# Altium PCB Star.PcbDoc
Units mm, origin at the board's own origin, x right, y up, seen from the top; angles counter-clockwise.
Board outline 199.68 x 189.91 mm, 4 copper layers (Top Copper, Signal Layer 1, Signal Layer 2, Bottom Copper), stack 1.57 mm thick; 86 components, 80 nets, 336 pads, 5 vias.
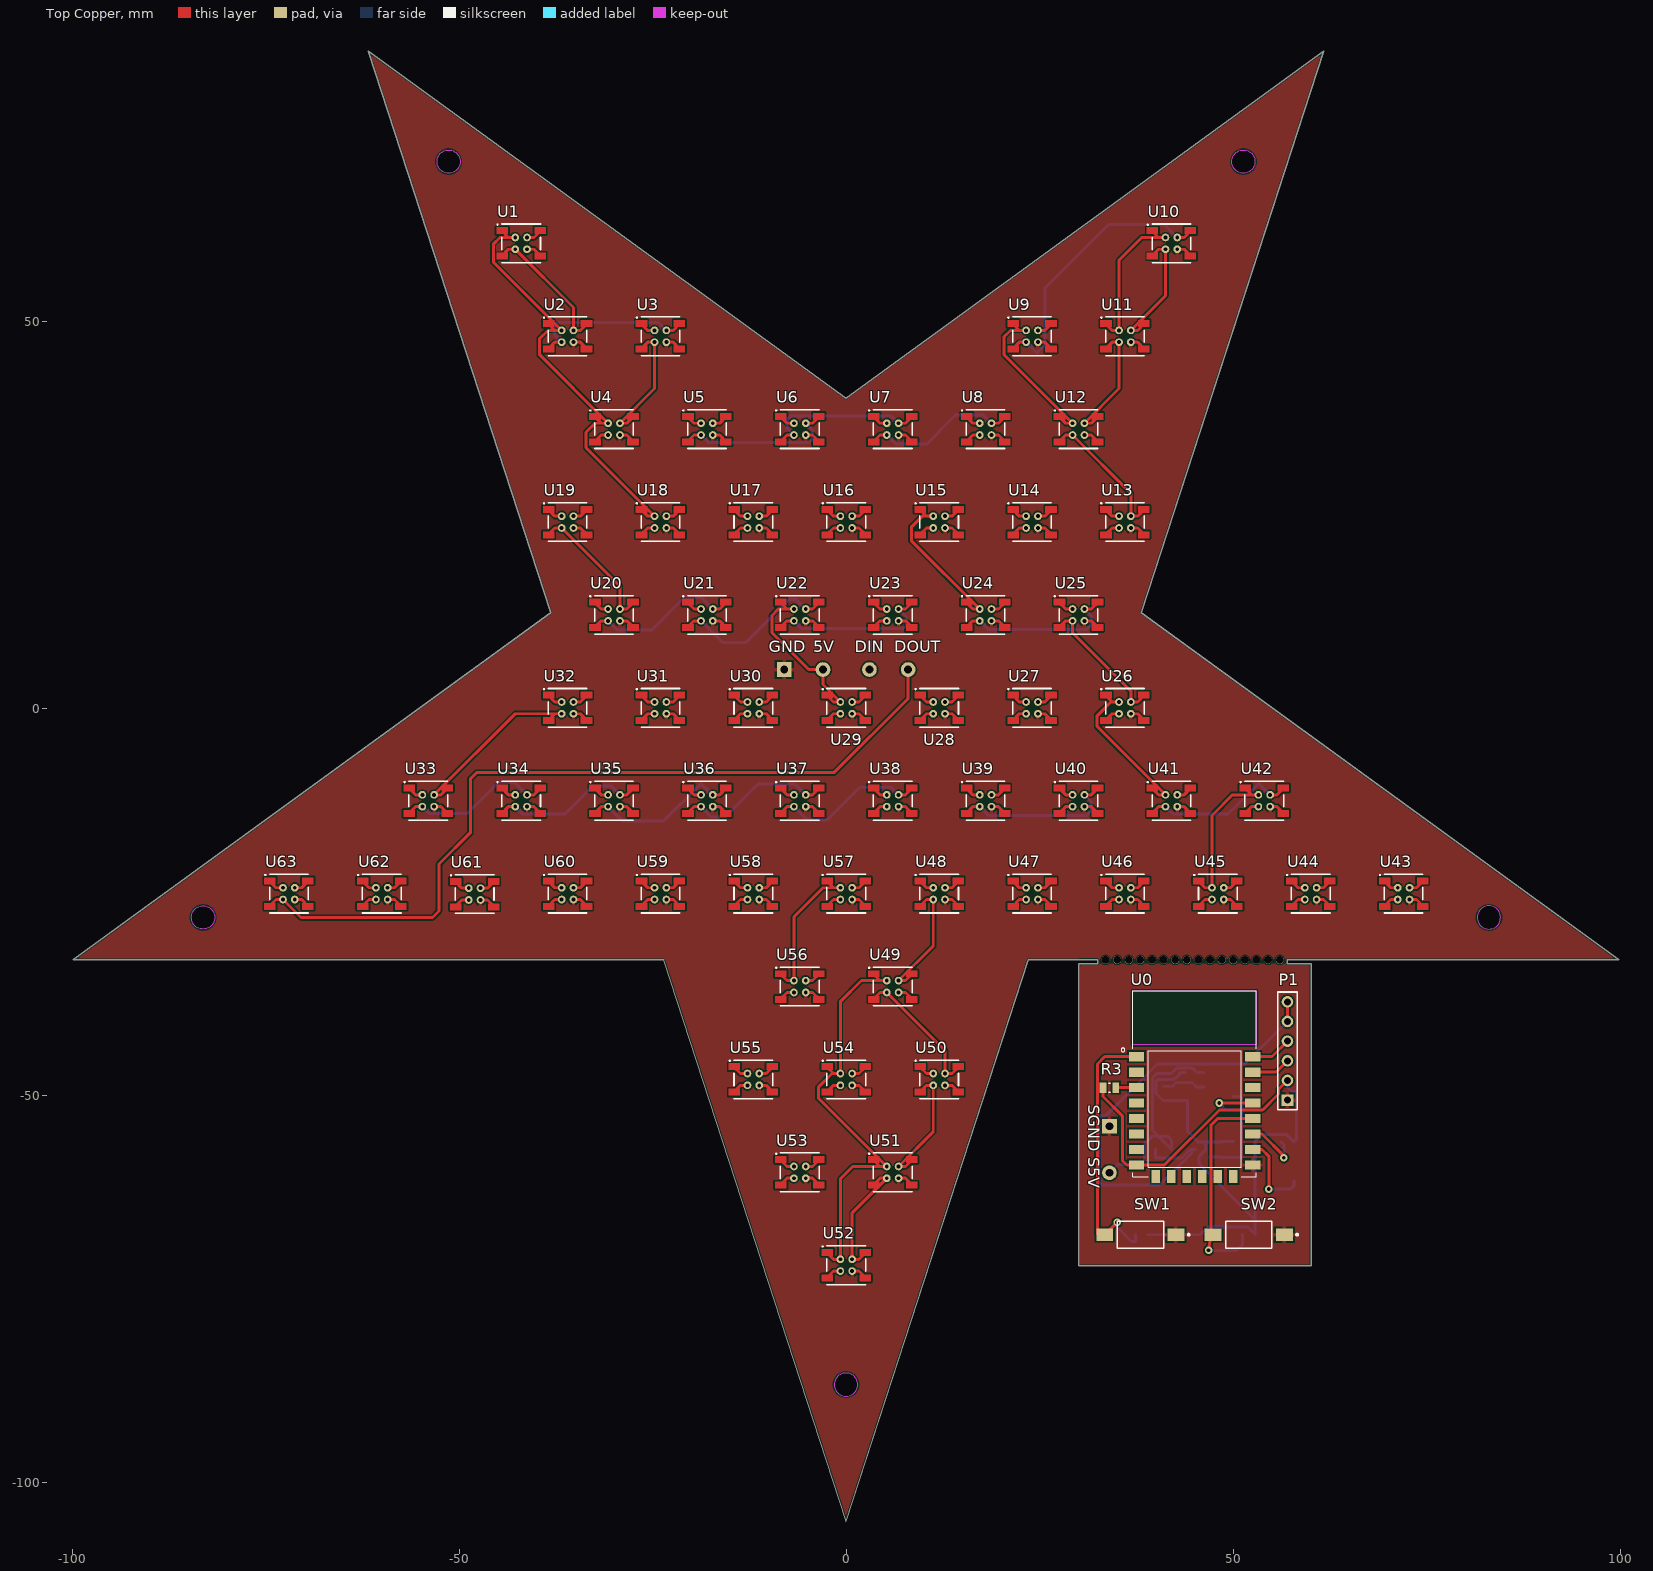
[diagram p0: Top Copper view]
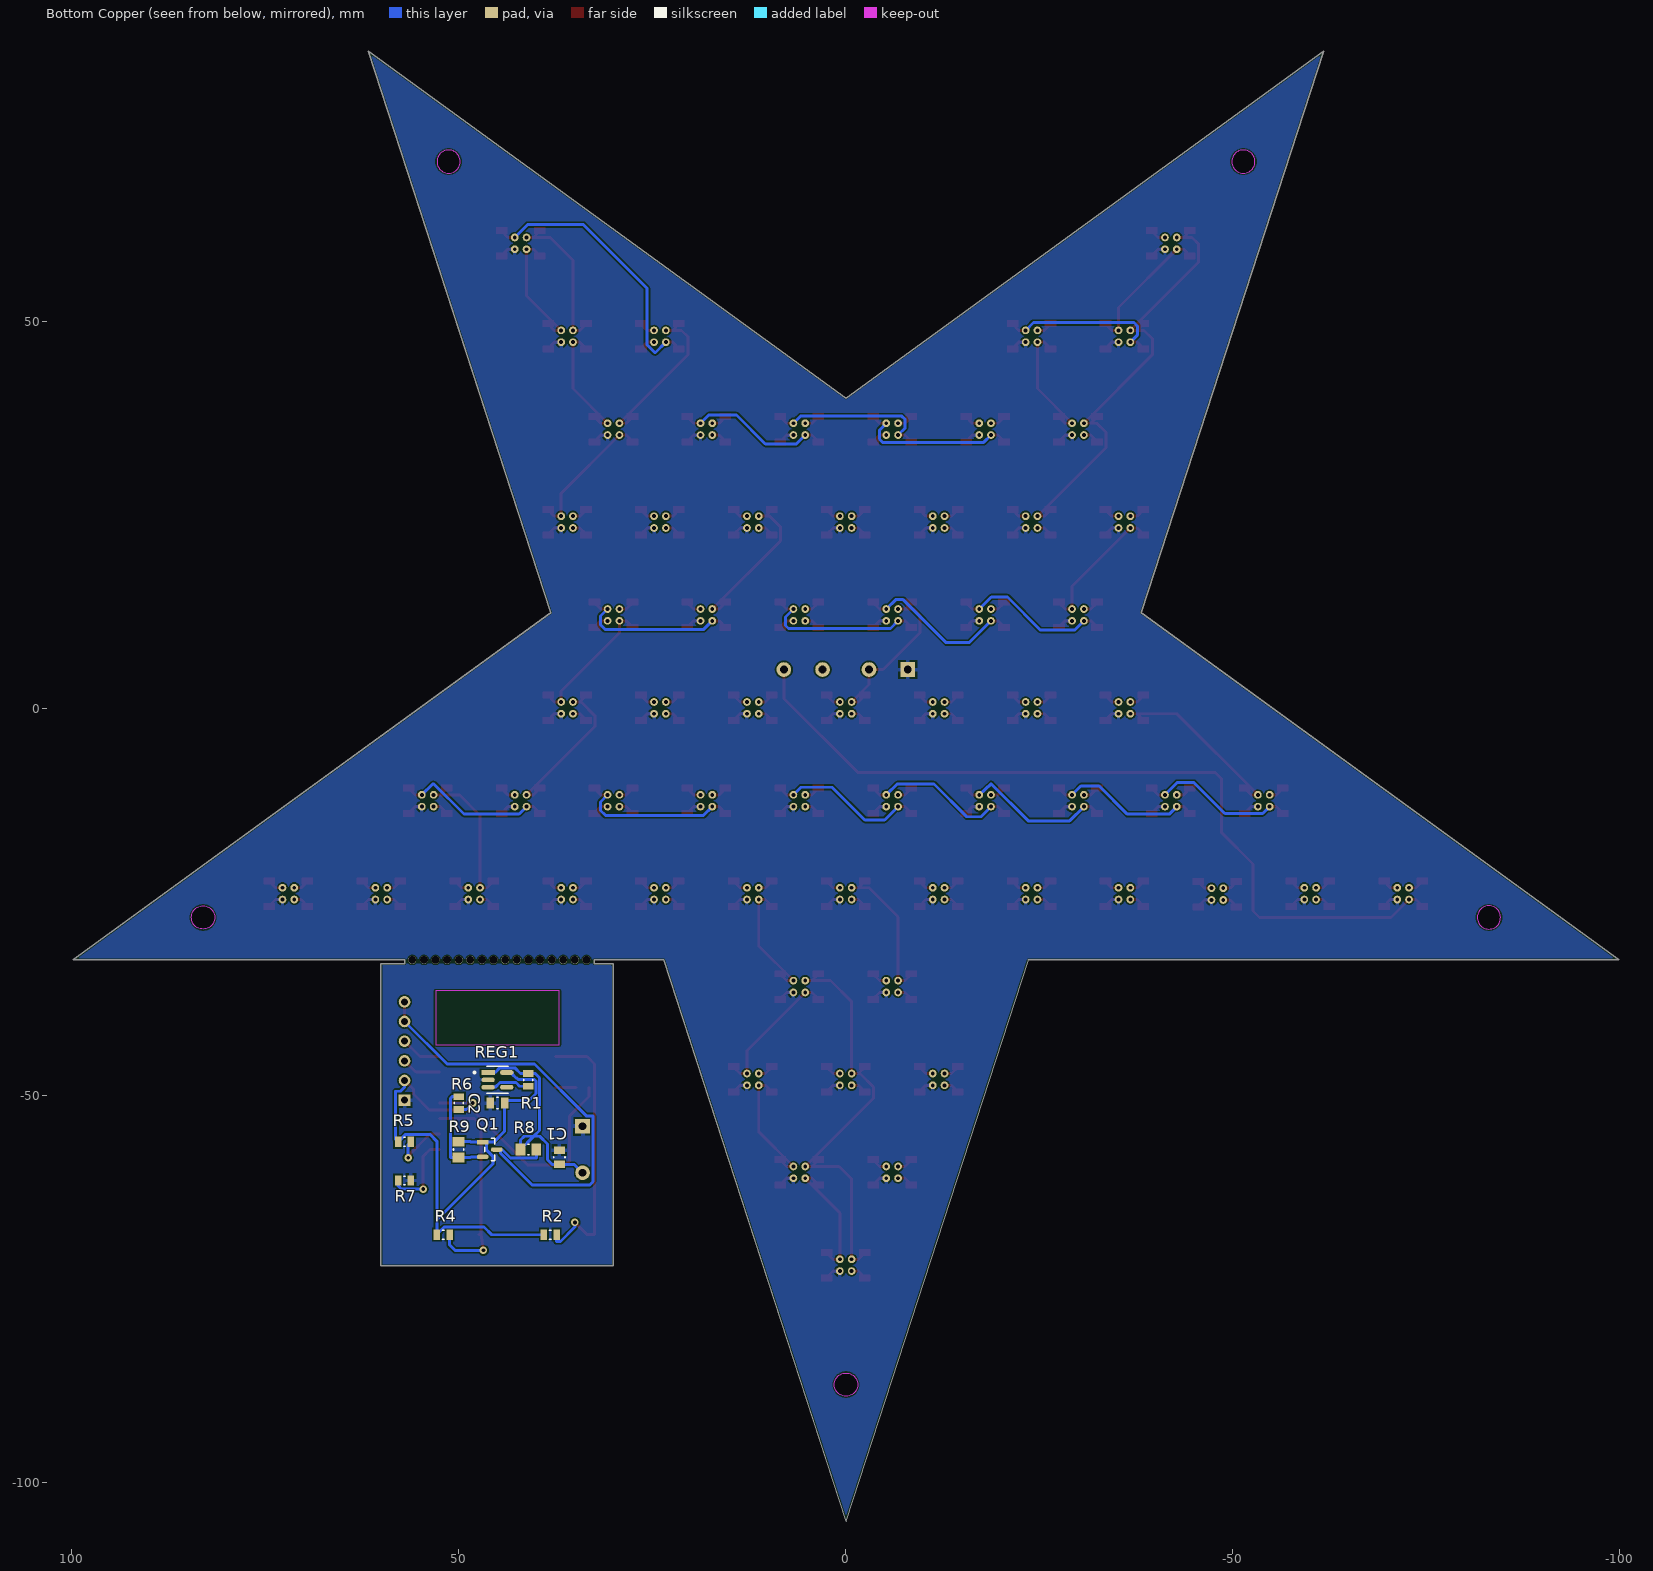
[diagram p1: Bottom Copper view, seen from below]
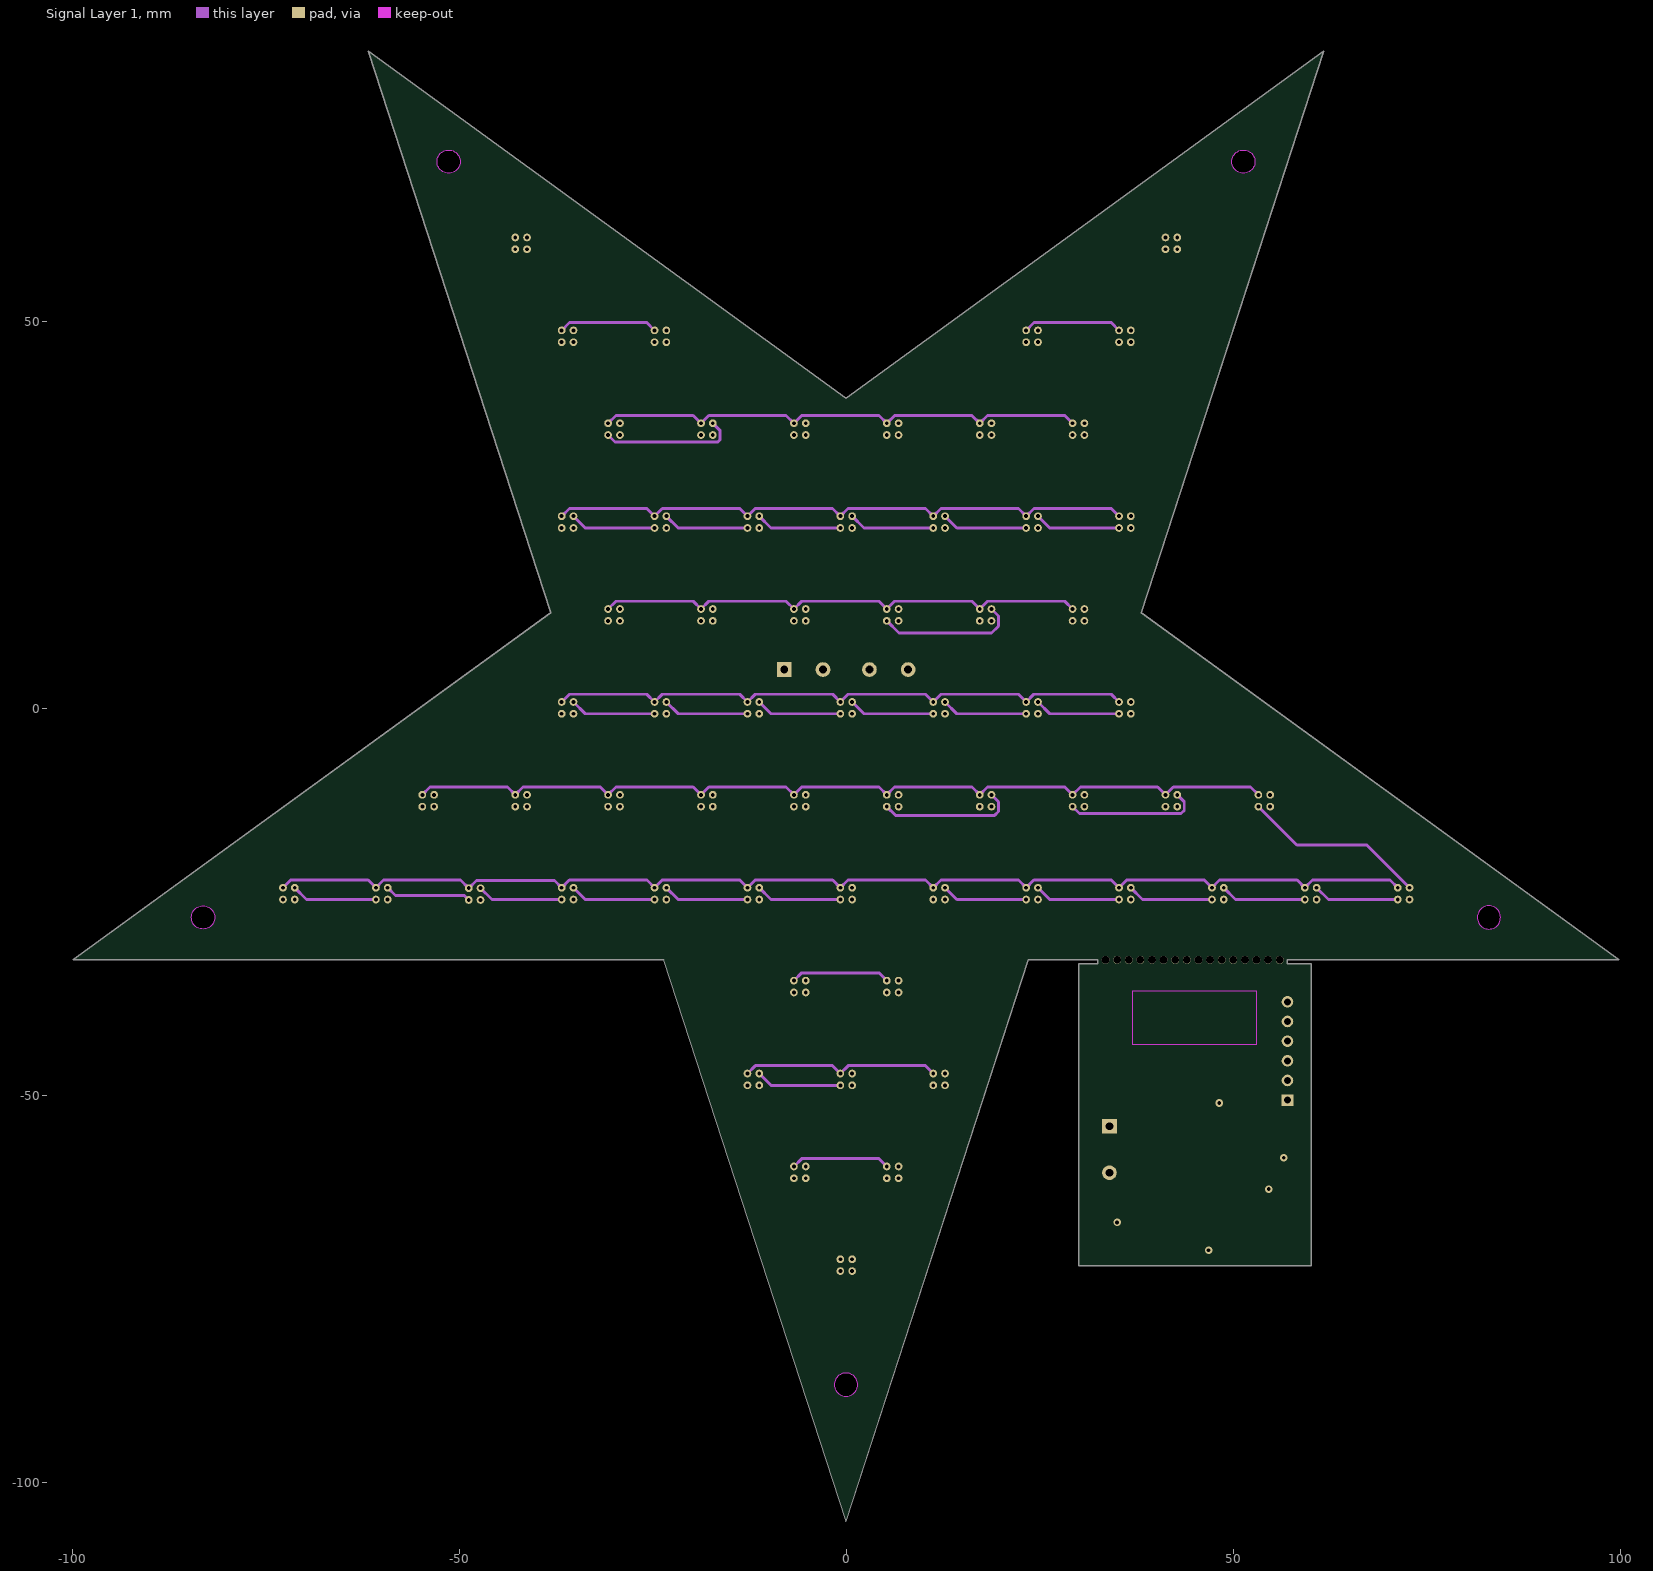
[diagram p2: Signal Layer 1]
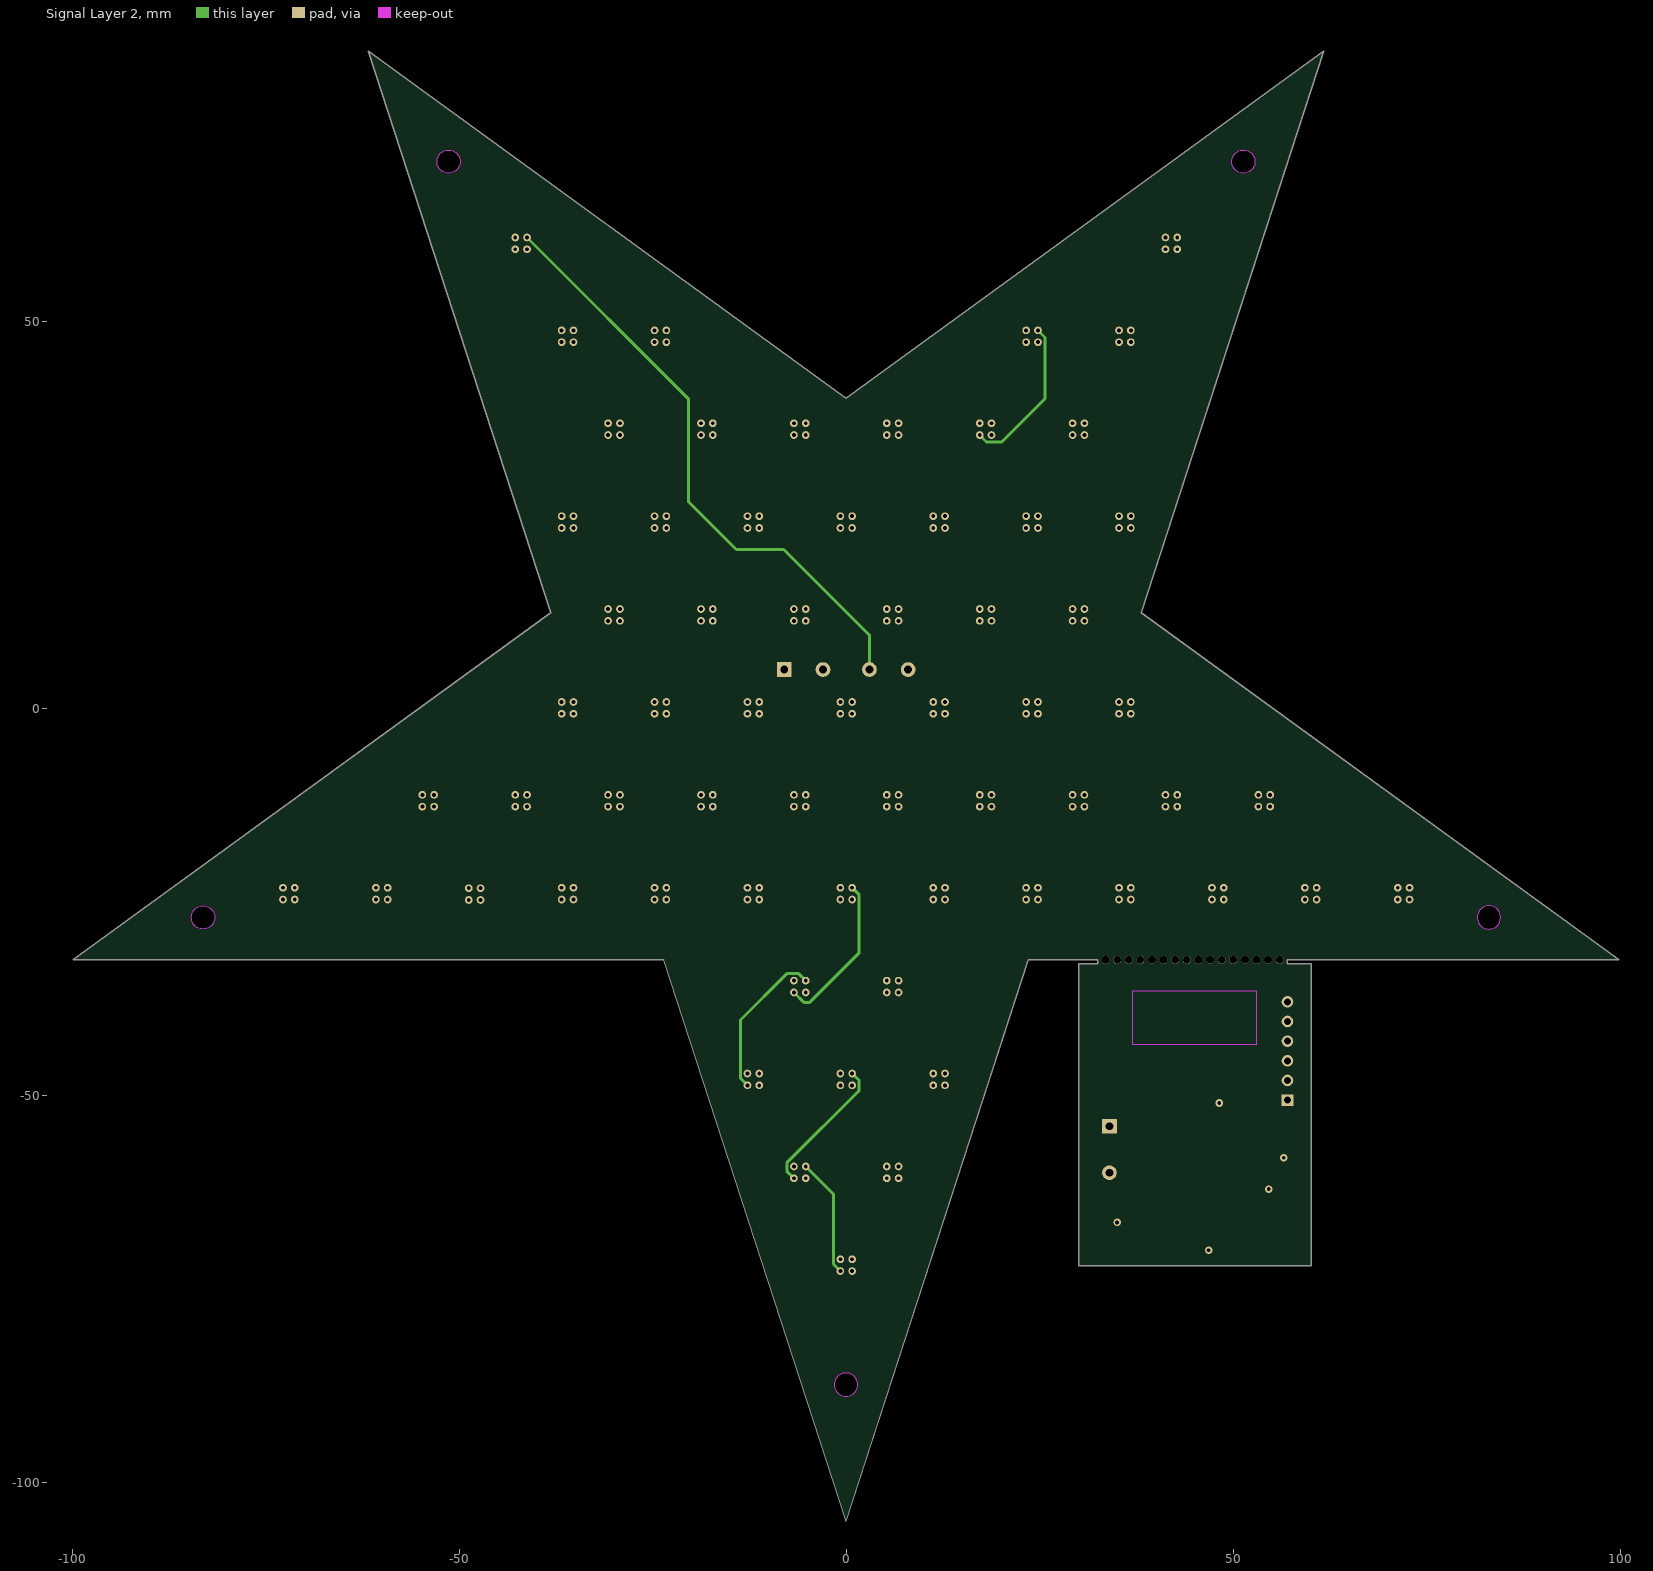
[diagram p3: Signal Layer 2]
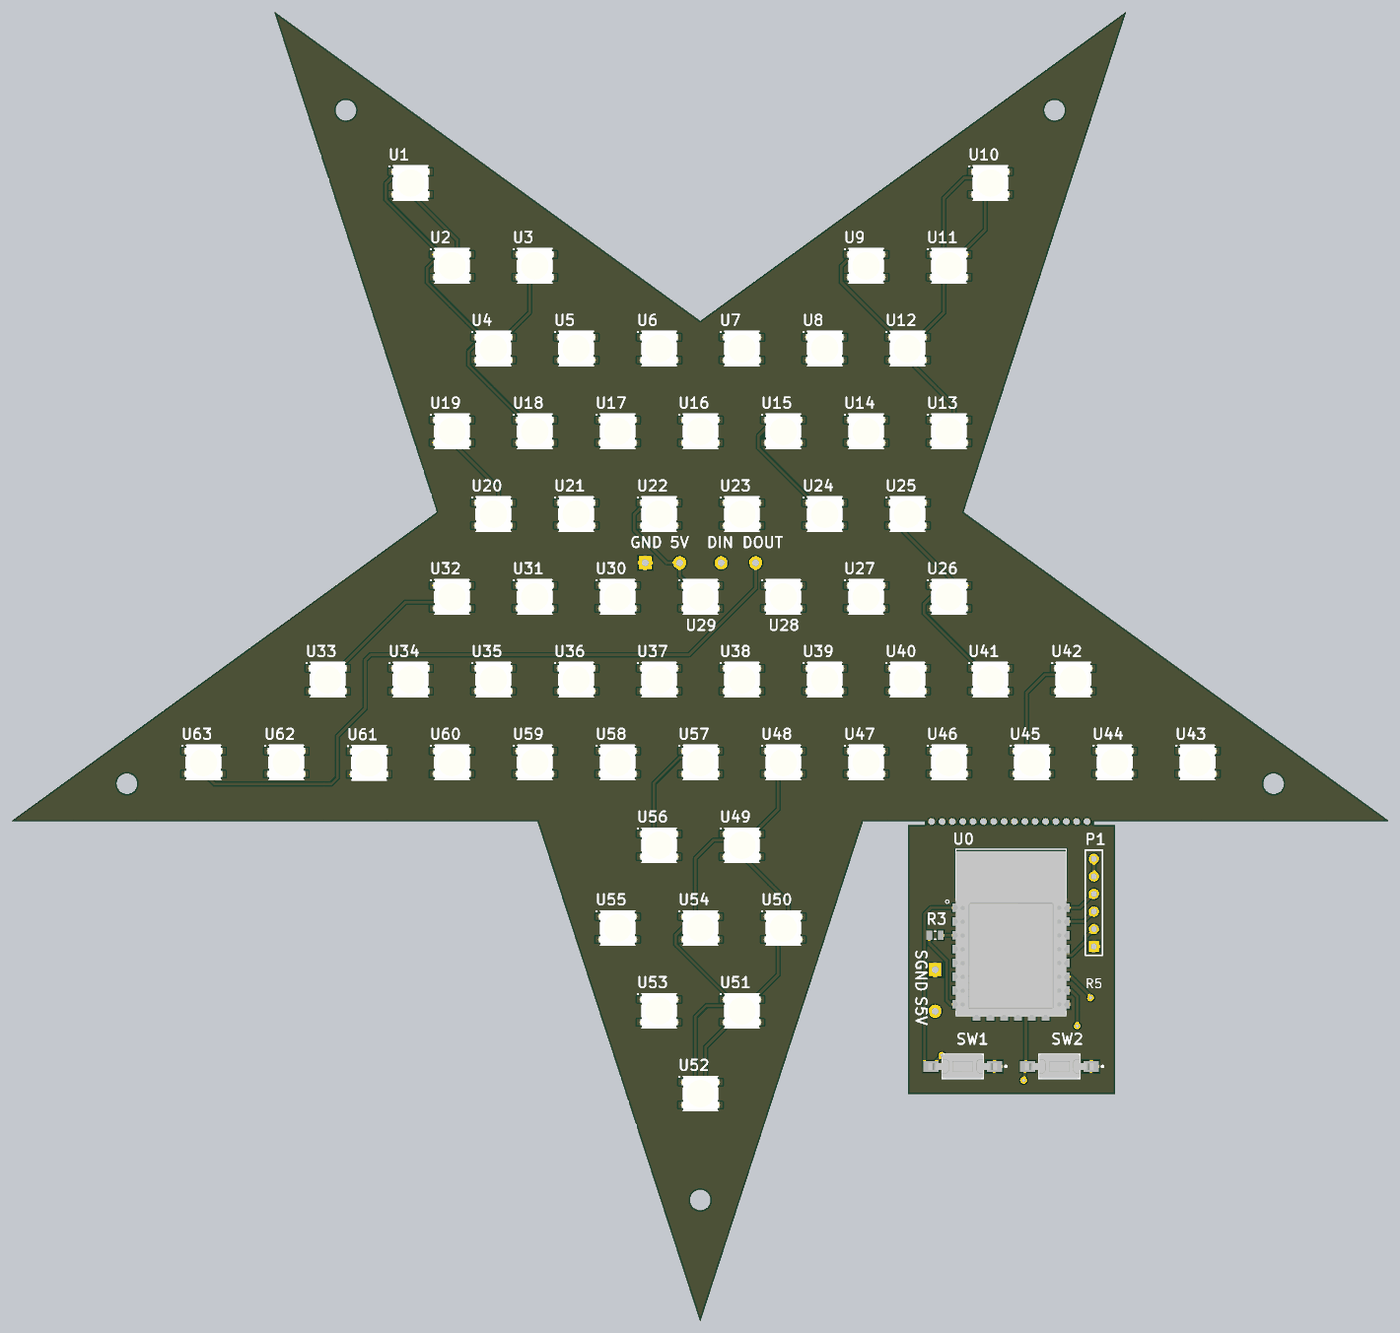
[diagram p4: 3D render of the assembled board from above, using the file's embedded part models]

## Layer stack, top to bottom
Top Mask: solder mask 0.015, Solder Resist, Dk 3.8
Top Copper: signal copper 0.035
Dielectric 1: prepreg 0.1, 2313, Dk 4.05
Signal Layer 1: signal copper 0.0175
Core: core 1.265, FR-4, Dk 4.5
Signal Layer 2: signal copper 0.0175
Dielectric 2: prepreg 0.1, 2313, Dk 4.05
Bottom Copper: signal copper 0.035
Bottom Mask: solder mask 0.015, Solder Resist, Dk 3.8

## Board outline
60.042,-33 57,-33 57,-32.485 60.042,-32.485 99.813,-32.478 38.113,12.35 61.678,84.891 -0.023,40.063 -61.732,84.891 -38.164,12.358 -99.867,-32.478 -23.601,-32.478 -0.027,-105.016 23.541,-32.483 30.049,-32.478 32.5,-32.478 32.5,-33 30.049,-33 30.057,-72 60.042,-72
cut-out: -51.359,69.114 cw(c-51.359,70.614) -52.859,70.614 cw(c-51.359,70.614) -51.359,72.114 cw(c-51.359,70.614) -49.859,70.614 cw(c-51.359,70.614)
cut-out: -83.084,-28.525 cw(c-83.084,-27.025) -84.584,-27.025 cw(c-83.084,-27.025) -83.084,-25.525 cw(c-83.084,-27.025) -81.584,-27.025 cw(c-83.084,-27.025)
cut-out: -1.527,-87.369 ccw(c-0.027,-87.369) -0.027,-88.869 ccw(c-0.027,-87.369) 1.473,-87.369 ccw(c-0.027,-87.369) -0.027,-85.869 ccw(c-0.027,-87.369)
cut-out: 81.53,-27.025 ccw(c83.03,-27.025) 83.03,-28.525 ccw(c83.03,-27.025) 84.53,-27.025 ccw(c83.03,-27.025) 83.03,-25.525 ccw(c83.03,-27.025)
cut-out: 51.305,69.114 cw(c51.305,70.614) 49.805,70.614 cw(c51.305,70.614) 51.305,72.114 cw(c51.305,70.614) 52.805,70.614 cw(c51.305,70.614)

## Design rules (kind name [scope] priority, off if disabled: settings)
BoardOutlineClearance [All] p1: gap=0.2 ignorepadtopadclearanceinfootprint=FALSE except(0.4: Arc-SplitBarrior Arc-SplitContinuation Track-SplitBarrior Track-SplitContinuation SMDPad-SplitBarrior SMDPad-SplitContinuation THPad-SplitBarrior THPad-SplitContinuation Via-SplitBarrior Via-SplitContinuation Fill-SplitBarrior Fill-SplitContinuation Poly-SplitBarrior Poly-SplitContinuation Region-SplitBarrior Region-SplitContinuation Text-SplitBarrior Text-SplitContinuation)
Clearance "Clearance Bottom Layer" [OnLayer('Bottom Layer')] p1: gap=0.203 ignorepadtopadclearanceinfootprint=TRUE except(0.254: Arc-Text Track-Text SMDPad-Text THPad-Text Via-Text Fill-Text Poly-Text Region-Text Text-Text)
Clearance "Clearance Top Layer" [OnLayer('Top Layer')] p2: gap=0.203 ignorepadtopadclearanceinfootprint=TRUE except(0.254: Arc-Text Track-Text SMDPad-Text THPad-Text Via-Text Fill-Text Poly-Text Region-Text Text-Text)
Clearance [All] p3: gap=0.2 ignorepadtopadclearanceinfootprint=FALSE except(0.089: Arc-Arc Arc-Track Arc-SMDPad Track-Track Track-SMDPad SMDPad-SMDPad; 0.127: Arc-Via Track-Via SMDPad-Via THPad-Via Via-Via; 0.254: Arc-Text Track-Text SMDPad-Text THPad-Text Via-Text Fill-Text Poly-Text Region-Text Text-Text)
HoleSize [All] p1: absolutevalues=TRUE maxlimit=6.3 minlimit=0.2 maxpercent=80.000 minpercent=20.000
MinimumAnnularRing [All] p1: minimumring=0.076
MinimumSolderMaskSliver [All] p1: minsoldermaskwidth=0.1
PolygonConnect PolygonConnect_1 [All] p1: thpad.connectstyle=Relief thpad.reliefconductorwidth=0.508 thpad.reliefentries=4 thpad.polygonreliefangle="90 Angle" thpad.airgapwidth=0.254 smdpad.connectstyle=Relief smdpad.reliefconductorwidth=0.508 smdpad.reliefentries=4 smdpad.polygonreliefangle="90 Angle" smdpad.airgapwidth=0.254 via.connectstyle=Direct via.reliefconductorwidth=0.508 via.reliefentries=4 via.polygonreliefangle="90 Angle" via.airgapwidth=0.254
RoutingCorners [All] p1: cornerstyle=Round minsetback=2.54 maxsetback=2.54
RoutingVias [All] p1: holewidth=0.5 width=1 viastyle="Through Hole" minholewidth=0.2 minwidth=0.45 maxholewidth=1 maxwidth=2
SilkToSilkClearance [All] p1: silktosilkclearance=0.1
SilkToSolderMaskClearance [IsPad] p1: minsilkscreentomaskgap=0.1 clearancetoexposedcopper=TRUE
SolderMaskExpansion [All] p1: expansion=0.102 istentingtop=FALSE
Width [All] p1: maxlimit=2.54 minlimit=0.089 preferedwidth=0.381
25 further rules are at their usual default settings.

## Classes and differential pairs
component class MCU: C1 C2 P1 Q1 R1 R2 R3 R4 R5 R6 R7 R8 R9 REG1 S5V SGND SW1 SW2 U0
component class LEDs: 5V DIN DOUT GND U1 U2 U3 U4 U5 U6 U7 U8 U9 U10 U11 U12 U13 U14 U15 U16 U17 U18 U19 U20 U21 U22 U23 U24 U25 U26 U27 U28 U29 U30 U31 U32 U33 U34 U35 U36 U37 U38 U39 U40 U41 U42 U43 U44 U45 U46 U47 U48 U49 U50 U51 U52 U53 U54 U55 U56 U57 U58 U59 U60 U61 U62 U63

## Components (designator, comment, footprint, x,y, rotation, side; value= is the part's Value field where it differs from the comment)
5V "StandardPadRound" StandardPadRound-Footprint-1 -3,5 r0 top
C1 "CC0805KKX7R6BB105" FP-CC0805-0_85-MFG 37,-58 r270 bottom value=10uF
C2 "CC0805KKX7R6BB105" FP-CC0805-0_85-MFG 45,-51 r180 bottom value=10uF
DIN "StandardPadRound" StandardPadRound-Footprint-1 3,5 r0 top
DOUT "StandardPadRound" StandardPadRound-Footprint-1 8,5 r90 top
GND "StandardPadSquare" StandardPadSquare-Footprint-1 -8,5 r0 top
P1 "Header 6" HDR1X6 57,-50.62 r90 top
Q1 "BSS138" FP-318-08-IPC_B 46,-57 r180 bottom
R1 "CRCW08050000Z0EA" RESC2013X50X30LL20T20 41,-48 r90 bottom value=10K
R2 "CRCW08050000Z0EA" RESC2013X50X30LL20T20 38.175,-68 r180 bottom value=10K
R3 "CRCW08050000Z0EA" RESC2013X50X30LL20T20 34,-49 r0 top value=10K
R4 "CRCW08050000Z0EA" RESC2013X50X30LL20T20 52,-68 r180 bottom value=10K
R5 "CRCW08050000Z0EA" RESC2013X50X30LL20T20 57,-56 r180 bottom value=10K
R6 "CRCW08050000Z0EA" RESC2013X50X30LL20T20 50,-51 r270 bottom value=0Ohm
R7 "CRCW08050000Z0EA" RESC2013X50X30LL20T20 57,-61 r180 bottom value=10K
R8 "10K" RESC2013X50X30ML20T20 41,-57 r180 bottom
R9 "10K" RESC2013X50X30ML20T20 50,-57 r270 bottom
REG1 "AP2112K-3.3TRG1" FP-SOT25-IPC_A 45,-48 r180 bottom
S5V "StandardPadRound" StandardPadRound-Footprint-1 34,-60 r270 top
SGND "StandardPadSquare" StandardPadSquare-Footprint-1 34,-54 r270 top
SW1 "FSMSMTR" TECO-FSMSMTR_V 38,-68 r180 top
SW2 "FSMSMTR" TECO-FSMSMTR_V 52,-68 r180 top
U0 "ESP8266-12E/ESP-12E" XCVR_ESP8266-12E%2FESP-12E 45,-52 r0 top
U1 "WS2812B" WS2812B-Footprint-1 -41.994,60.056 r0 top
U2 "WS2812B" WS2812B-Footprint-1 -35.994,48.056 r0 top
U3 "WS2812B" WS2812B-Footprint-1 -23.994,48.056 r0 top
U4 "WS2812B" WS2812B-Footprint-1 -29.994,36.056 r0 top
U5 "WS2812B" WS2812B-Footprint-1 -17.994,36.056 r0 top
U6 "WS2812B" WS2812B-Footprint-1 -5.994,36.056 r0 top
U7 "WS2812B" WS2812B-Footprint-1 6.006,36.056 r0 top
U8 "WS2812B" WS2812B-Footprint-1 18.006,36.056 r0 top
U9 "WS2812B" WS2812B-Footprint-1 24.006,48.056 r0 top
U10 "WS2812B" WS2812B-Footprint-1 42.006,60.056 r0 top
U11 "WS2812B" WS2812B-Footprint-1 36.006,48.056 r0 top
U12 "WS2812B" WS2812B-Footprint-1 30.006,36.056 r0 top
U13 "WS2812B" WS2812B-Footprint-1 36.006,24.056 r0 top
U14 "WS2812B" WS2812B-Footprint-1 24.006,24.056 r0 top
U15 "WS2812B" WS2812B-Footprint-1 12.006,24.056 r0 top
U16 "WS2812B" WS2812B-Footprint-1 0.006,24.056 r0 top
U17 "WS2812B" WS2812B-Footprint-1 -11.994,24.056 r0 top
U18 "WS2812B" WS2812B-Footprint-1 -23.994,24.056 r0 top
U19 "WS2812B" WS2812B-Footprint-1 -35.994,24.056 r0 top
U20 "WS2812B" WS2812B-Footprint-1 -29.994,12.056 r0 top
U21 "WS2812B" WS2812B-Footprint-1 -17.994,12.056 r0 top
U22 "WS2812B" WS2812B-Footprint-1 -5.994,12.056 r0 top
U23 "WS2812B" WS2812B-Footprint-1 6.006,12.056 r0 top
U24 "WS2812B" WS2812B-Footprint-1 18.006,12.056 r0 top
U25 "WS2812B" WS2812B-Footprint-1 30.006,12.056 r0 top
U26 "WS2812B" WS2812B-Footprint-1 36.006,0.056 r0 top
U27 "WS2812B" WS2812B-Footprint-1 24.006,0.056 r0 top
U28 "WS2812B" WS2812B-Footprint-1 12.006,0.056 r0 top
U29 "WS2812B" WS2812B-Footprint-1 0.006,0.056 r0 top
U30 "WS2812B" WS2812B-Footprint-1 -11.994,0.056 r0 top
U31 "WS2812B" WS2812B-Footprint-1 -23.994,0.056 r0 top
U32 "WS2812B" WS2812B-Footprint-1 -35.994,0.056 r0 top
U33 "WS2812B" WS2812B-Footprint-1 -53.994,-11.944 r0 top
U34 "WS2812B" WS2812B-Footprint-1 -41.994,-11.944 r0 top
U35 "WS2812B" WS2812B-Footprint-1 -29.994,-11.944 r0 top
U36 "WS2812B" WS2812B-Footprint-1 -17.994,-11.944 r0 top
U37 "WS2812B" WS2812B-Footprint-1 -5.994,-11.944 r0 top
U38 "WS2812B" WS2812B-Footprint-1 6.006,-11.944 r0 top
U39 "WS2812B" WS2812B-Footprint-1 18.006,-11.944 r0 top
U40 "WS2812B" WS2812B-Footprint-1 30.006,-11.944 r0 top
U41 "WS2812B" WS2812B-Footprint-1 42.006,-11.944 r0 top
U42 "WS2812B" WS2812B-Footprint-1 54.006,-11.944 r0 top
U43 "WS2812B" WS2812B-Footprint-1 72.006,-23.944 r0 top
U44 "WS2812B" WS2812B-Footprint-1 60.006,-23.944 r0 top
U45 "WS2812B" WS2812B-Footprint-1 48.006,-23.944 r0 top
U46 "WS2812B" WS2812B-Footprint-1 36.006,-23.944 r0 top
U47 "WS2812B" WS2812B-Footprint-1 24.006,-23.944 r0 top
U48 "WS2812B" WS2812B-Footprint-1 12.006,-23.944 r0 top
U49 "WS2812B" WS2812B-Footprint-1 6.006,-35.944 r0 top
U50 "WS2812B" WS2812B-Footprint-1 12.006,-47.944 r0 top
U51 "WS2812B" WS2812B-Footprint-1 6.006,-59.944 r0 top
U52 "WS2812B" WS2812B-Footprint-1 0.006,-71.944 r0 top
U53 "WS2812B" WS2812B-Footprint-1 -5.994,-59.944 r0 top
U54 "WS2812B" WS2812B-Footprint-1 0.006,-47.944 r0 top
U55 "WS2812B" WS2812B-Footprint-1 -11.994,-47.944 r0 top
U56 "WS2812B" WS2812B-Footprint-1 -5.994,-35.944 r0 top
U57 "WS2812B" WS2812B-Footprint-1 0.006,-23.944 r0 top
U58 "WS2812B" WS2812B-Footprint-1 -11.994,-23.944 r0 top
U59 "WS2812B" WS2812B-Footprint-1 -23.994,-23.944 r0 top
U60 "WS2812B" WS2812B-Footprint-1 -35.994,-23.944 r0 top
U61 "WS2812B" WS2812B-Footprint-1 -48,-24 r0 top
U62 "WS2812B" WS2812B-Footprint-1 -59.994,-23.944 r0 top
U63 "WS2812B" WS2812B-Footprint-1 -71.994,-23.944 r0 top

## Footprints (in the part's own frame and the unit in brackets; to place one, negate y for a bottom-side part, rotate by r counter-clockwise, add the part's x,y. Pads: shape width x height; smd on the part's side, far side on the other; paste and mask are expansions set on the pad)
FP-318-08-IPC_B [mm]
  rect 1.524x0.578 smd paste+0 mask+0: 1(-0.91,0.95)
  rrect100% 1.524x0.578 smd paste+0 mask+0: 2(-0.91,-0.95) 3(0.91,0)
  silkscreen extent -0.65,-1.45 0.65,1.45, body extent -1.2,-1.45 1.2,1.45, height 1.11
FP-CC0805-0_85-MFG [mm]
  rect 0.95x1.4 smd paste+0 mask+0: 1(-0.925,0) 2(0.925,0)
  silkscreen extent -0.07,-0.73 0.07,0.73, body extent -1,-0.62 1,0.62, height 0.95
FP-SOT25-IPC_A [mm]
  rect 1.707x0.616 smd paste+0 mask+0: 1(-1.201,0.95)
  rrect100% 1.707x0.616 smd paste+0 mask+0: 2(-1.201,0) 3(-1.201,-0.95) 4(1.201,-0.95) 5(1.201,0.95)
  silkscreen extent -3.08,-1.75 1.4,1.75, body extent -1.4,-1.47 1.4,1.45, height 1.45
HDR1X6 [mm] "Connector; Header; 6 Position"
  rect 1.5x1.5 hole 0.9: 1(0,0)
  round 1.5 hole 0.9: 2(2.54,0) 3(5.08,0) 4(7.62,0) 5(10.16,0) 6(12.7,0)
  silkscreen extent -1.27,-1.27 13.97,1.27
RESC2013X50X30LL20T20 [mm] "Chip Resistor, 2-Leads, Body 2.00x1.25mm, IPC High Density"
  rect 0.85x1.35 smd: 1(-0.825,0) 2(0.825,0)
  silkscreen extent -0.1,-0.58 0.1,0.58, body extent -1.1,-0.72 1.1,0.72, height 0.5
RESC2013X50X30ML20T20 [mm] "Chip Resistor, 2-Leads, Body 2.00x1.25mm, IPC Low Density"
  rect 1.25x1.55 smd: 1(-1.025,0) 2(1.025,0)
  silkscreen extent -0.1,-0.67 0.1,0.67, body extent -1.1,-0.72 1.1,0.72, height 0.5
StandardPadRound-Footprint-1 [mil]
  round 75 hole 40: 1(0,0)
StandardPadSquare-Footprint-1 [mil]
  rect 75x75 hole 40: 1(0,0)
TECO-FSMSMTR_V [mm] "SMD, 2-Leads, Body 6x3.5mm, Pitch 9.19mm"
  rect 2.2x1.6 smd: 1(-4.595,0)
  rect 2.18x1.6 smd: 2(4.595,0)
  silkscreen extent -6.37,-1.75 3,1.75, body extent -4.98,-1.75 4.98,1.75, height 4.4
WS2812B-Footprint-1 [mm]
  round 1 hole 0.5: 1(-0.762,0.762) 2(-0.762,-0.762) 3(0.762,-0.762) 4(0.762,0.762)
  Top Copper region: -3.2,1.2 -1.7,1.2 -1.7,2.1 -3.2,2.1
  Top Copper region: -3.2,-2.1 -1.7,-2.1 -1.7,-1.2 -3.2,-1.2
  Top Copper region: 1.7,-2.1 3.2,-2.1 3.2,-1.2 1.7,-1.2
  Top Copper region: 1.7,1.2 3.2,1.2 3.2,2.1 1.7,2.1
  Top Copper lines w0.381: -2.54,-1.651 -1.651,-0.762 -0.762,-0.762 ; -2.54,1.651 -1.651,0.762 -0.762,0.762 ; 0.762,-0.762 1.651,-0.762 2.54,-1.651 ; 0.762,0.762 1.651,0.762 2.54,1.651
  silkscreen extent -3.08,-2.5 2.5,2.5, body extent -2.7,-2.5 2.7,2.5, height 1.69
XCVR_ESP8266-12E%2FESP-12E [mm]
  rect 2x1.2 smd: 1(-7.5,7) 2(-7.5,5) 3(-7.5,3) 4(-7.5,1) 5(-7.5,-1) 6(-7.5,-3) 7(-7.5,-5) 8(-7.5,-7) 15(7.5,-7) 16(7.5,-5) 17(7.5,-3) 18(7.5,-1) 19(7.5,1) 20(7.5,3) 21(7.5,5) 22(7.5,7)
  rect 1.1x1.7 smd: 9(-5,-8.5) 10(-3,-8.5) 11(-1,-8.5) 12(1,-8.5) 13(3,-8.5) 14(5,-8.5)
  Keep-Out Layer region: 8,8.51 -8.009,8.51 -8.009,15.5 8,15.5
  Keep-Out Layer region: 8,8.51 -8.009,8.51 -8.009,15.5 8,15.5
  silkscreen extent -9.5,-8.5 8,15.5, body extent -8,-8.83 8,15.18, height 3.48

## Part data
5V DIN DOUT S5V: library part CMP-000003-1, "1.9mm x 1.9mm round pad with a 1mm hole"
C1 C2: library part CMP-03422-000182-1, "CAP CER 1UF 10V X7R 0805", Capacitance="1 uF", Manufacturer=Yageo, Package=CC0805-0.85, Temperature="-30°C to +85°C", Temperature Characteristic=X7R, Temperature Range High=+85°C, Temperature Range Low=-30°C, Tolerance=0.1, Voltage Rating="10 V", Automotive=No, Category=Cap, ComponentLink2Description=Datasheet, ComponentLink2URL=http://www.yageo.com/documents/recent/UPY-GPHC_Y5V_6.3V-to-50V_8.pdf, Device Class L1="Passive Components", Device Class L2=Capacitors, Device Class L3="Ceramic Capacitors", Digikey Description="CAP CER 1UF 10V X7R 0805", Footprint Url=http://www.yageo.com/exep/pages/download/literatures/UPY-C_GEN_24.pdf, Height=0.95mm, Ipc Land Pattern Name=CAPC200125X85, Lead Free=Yes, Manufacturer Part Number=CC0805KKX7R6BB105, Material=Ceramic, Mouser Description="Multilayer Ceramic Capacitors MLCC - SMD/SMT 1.0uF 10V X7R 10%", Octopart=https://octopart.com/cc0805kkx7r6bb105-yageo-42522859, RoHS=TRUE
GND SGND: library part CMP-000004-1, "1.9mm X 1.9mm square pad with 1mm hole"
P1: library part CMP-049-0107-1, "Header, 6-Pin", Component Type=Standard, Design Item ID="Header 6", LatestRevisionDate=17-Jul-2002, LatestRevisionNote="Re-released for DXP Platform.", Pin Count=6, Publisher="Altium Limited", Source="Miscellaneous Connectors.SchLib"
Q1: library part CMP-07173-000101-1, "MOSFET N-CH 50V 220MA SOT-23", Case/Package=SOT-23, Continuous Drain Current (ID)=220mA, Drain to Source Breakdown Voltage=50V, Drain to Source Resistance=3.5R, Gate to Source Voltage (Vgs)=20V, Input Capacitance=27pF, Max Operating Temperature=150°C, Max Power Dissipation=360mW, Min Operating Temperature=-55°C, On-State Resistance=6R, Package Quantity=1, Threshold Voltage=1.3V, Contact Plating=Tin, Current Rating=220mA, Drain to Source Voltage (Vdss)=50V, Dual Supply Voltage=50V, Element Configuration=Single, Fall Time=9ns, Height=0.93mm, Lead Free="Lead Free", Length=2.92mm, Mount="Surface Mount", Nominal Vgs=1.3V, Number of Elements=1, Number of Pins=3, Packaging="Tape and Reel", Power Dissipation=360mW, Radiation Hardening=No, Rds On Max=3.5R, REACH SVHC="No SVHC", Rise Time=9ns, Termination=SMD/SMT, Turn-Off Delay Time=20ns, Turn-On Delay Time=2.5ns, Voltage Rating (DC)=50V, Weight=0.03g, Width=1.3mm
R1 R2 R3 R4 R5 R6 R7: library part CMP-2001-04896-1, "0805", Manufacturer="Vishay Dale", Part Number=CRCW08050000Z0EA
R8 R9: library part CMP-2001-03735-1, Manufacturer="Vishay Dale", Part Number=CRCW0805270RFKEA
REG1: library part CMP-12756-000035-1, "IC REG LINEAR 3.3V 600MA SOT25", Case/Package=SOT-23-5, Dropout Voltage=250mV, Max Input Voltage=6V, Max Operating Temperature=85°C, Max Output Current=600mA, Min Input Voltage=2.5V, Min Operating Temperature=-40°C, Output Voltage=3.3V, Package Quantity=1, Quiescent Current=55uA, Accuracy=1.5%, Height=1.3mm, Lead Free="Lead Free", Length=3.1mm, Mount="Surface Mount", Number of Outputs=1, Number of Pins=5, Number of Regulators=1, Output Current=600mA, Output Type=Fixed, Packaging="Tape and Reel", Polarity=Positive, Width=1.7mm
SW1 SW2: library part CMP-2000-07501-1, "FSMSM Push Button Switch, 50 mA, -35 to 85 degC, 2-Pin SMD, RoHS, Tape and Reel", Case\/Package=SMD/SMT, Contact Current Rating=50mA, Contact Resistance=100mOhm, Manufacturer="TE Connectivity", Max Operating Temperature=85degC, Max Voltage Rating (DC)=12V, Min Operating Temperature=-35degC, Operating Force=180gf, Package Description="2-Pin Surface Mount Device, Body 6 x 3.5 mm, Pitch 9.19 mm", Package Quantity=1800, Voltage Rating (DC)=24V, Actuator Length=1.07mm, Actuator Material=Polyamide, Contact Material=Brass, Contact Plating=Silver, Current Rating=50mA, Datasheet URL=http://www.te.com/commerce/DocumentDelivery/DDEController?Action=showdoc&DocId=Customer+Drawing%7F1437566-3%7FC2%7Fpdf%7FEnglish%7FENG_CD_1437566-3_C2_1437566_3_1_c.dwg.pdf%7F1437566-4, Datasheet Version="Rev. C2, 08/2014", Electrical Life=20000Cycles, ELV=Compliant, Illumination Type=Illuminated, Lead Free=LeadFree, Manufacturer URL=http://www.te.com/, Mechanical Life=20000Cycles, Mount=SurfaceMount, Mounting Technology=SurfaceMount, Orientation=Straight, Package Reference=FSMSMTR, Packaging=TapeandReel, REACH SVHC=Unknown, RoHSCompliant=true, Switch Travel=0.25mm, Termination=GullWing, Throw Configuration=SPST
U0: library part CMP-052-0000-2, "This WiFi module has a 32-bit MCU micro and clock speeds supporting 80 MHz or 160 MHz. Supports the RTOS and integrated Wi-Fi MAC/BB/RF/PA/LNA, and has an on-board antenna.", Package=None, Availability=Unavailable, Component Type=Standard, Design Item ID=ESP8266-12E/ESP-12E, MF=AI-Thinker, MP=ESP8266-12E/ESP-12E, Pin Count=22, Price=None, SnapEDA_Link=https://www.snapeda.com/parts/ESP8266-12E/ESP-12E/AI-Thinker/view-part/106414/?ref=snap, Source=SnapEDAsch.SchLib
U1 U2 U3 U4 U5 U6 U7 U8 U9 U10 U11 U12 U13 U14 U15 U16 U17 U18 U19 U20 U21 U22 U23 U24 U25 U26 U27 U28 U29 U30 U31 U32 U33 U34 U35 U36 U37 U38 U39 U40 U41 U42 U43 U44 U45 U46 U47 U48 U49 U50 U51 U52 U53 U54 U55 U56 U57 U58 U59 U60 U61 U62 U63: library part CMP-007-00035-2, "Intelligent Control LED Integrated Light Source, 3.5 to 5.3 V, -25 to 80 degC, 4-Pin SMD, RoHS, Bulk", Manufacturer="Adafruit Industries", Package Description="4-Pin Surface Mount Device, Body 5 x 5 mm, Pitch 3.3 mm", Case/Package=WS2812B, Datasheet URL=https://cdn-shop.adafruit.com/datasheets/WS2812B.pdf, Datasheet Version=May-13, Manufacturer URL=https://www.adafruit.com/, Mounting Technology=SM, Package Reference=WS2812B, RoHS Compliant=False

## Free pads (board coordinates)
  round 1 hole 1: 7(35,-32.5) 7(36.5,-32.5) 7(38,-32.5) 7(39.5,-32.5) 7(41,-32.5) 7(42.5,-32.5) 7(44,-32.5) 7(45.5,-32.5) 7(47,-32.5) 7(48.5,-32.5) 7(50,-32.5) 7(51.5,-32.5) 7(53,-32.5) 7(54.5,-32.5) 7(56,-32.5) 8(33.5,-32.5)

## Via types
v1: diameter 1, hole 0.5, Top Copper to Bottom Copper, 5 vias

## Nets (pads, with @x,y where several pads share a name; then routed paths per layer and width w, separated by ;. In a path a pad name is that pad's centre, name@x,y a point inside that pad or via, vN(x,y) a via of type N, cw(c..) or ccw(c..) an arc to the next point about the centre after c; other vN are vias at no path point)
GND: GND.1 U1.3 U2.3 U3.3 U4.3 U5.3 U6.3 U7.3 U8.3 U9.3 U10.3 U11.3 U12.3 U13.3 U14.3 U15.3 U16.3 U17.3 U18.3 U19.3 U20.3 U21.3 U22.3 U23.3 U24.3 U25.3 U26.3 U27.3 U28.3 U29.3 U30.3 U31.3 U32.3 U33.3 U34.3 U35.3 U36.3 U37.3 U38.3 U39.3 U40.3 U41.3 U42.3 U43.3 U44.3 U45.3 U46.3 U47.3 U48.3 U49.3 U50.3 U51.3 U52.3 U53.3 U54.3 U55.3 U56.3 U57.3 U58.3 U59.3 U60.3 U61.3 U62.3 U63.3
Net5V_1: 5V.1 U1.1 U2.1 U3.1 U4.1 U5.1 U6.1 U7.1 U8.1 U9.1 U10.1 U11.1 U12.1 U13.1 U14.1 U15.1 U16.1 U17.1 U18.1 U19.1 U20.1 U21.1 U22.1 U23.1 U24.1 U25.1 U26.1 U27.1 U28.1 U29.1 U30.1 U31.1 U32.1 U33.1 U34.1 U35.1 U36.1 U37.1 U38.1 U39.1 U40.1 U41.1 U42.1 U43.1 U44.1 U45.1 U46.1 U47.1 U48.1 U49.1 U50.1 U51.1 U52.1 U53.1 U54.1 U55.1 U56.1 U57.1 U58.1 U59.1 U60.1 U61.1 U62.1 U63.1 | length 854
  Top Copper w0.381: U1.1 -43.645,60.818 -44.725,60.818 -45.589,59.954 -45.589,57.65 U2.1 -37.645,48.818 -38.539,48.818 -39.595,47.762 -39.595,45.656 U4.1 -31.645,36.818 -32.432,36.818 -33.6,35.649 -33.6,33.662 U18.1 ; U56.1 -6.756,-26.943 -2.995,-23.182 -1.645,-23.182 U57.1 ; U22.1 -7.645,12.818 -8.778,12.818 -9.597,11.999 -9.597,9.764 -4.834,5 5V.1 -3,3.061 U29.1 ; U52.1 -0.756,-60.796 0.857,-59.182 4.355,-59.182 U51.1 -3.603,-50.336 -3.603,-48.961 -1.824,-47.182 -1.645,-47.182 U54.1 -0.756,-37.91 1.972,-35.182 4.355,-35.182 U49.1 ; U15.1 10.355,24.818 9.834,24.818 8.411,23.395 8.411,21.65 U24.1 ; U9.1 22.355,48.818 21.213,48.818 20.4,48.005 20.4,45.661 U12.1 ; U26.1 34.355,0.818 34.187,0.818 32.414,-0.955 32.414,-2.353 U41.1 ; U11.1 35.244,57.881 38.18,60.818 40.355,60.818 U10.1 ; U45.1 47.244,-13.837 49.899,-11.182 52.355,-11.182 U42.1
  Signal Layer 1 w0.381: U63.1 -71.763,-22.19 -61.749,-22.19 U62.1 -59.763,-22.19 -49.81,-22.19 U61.1 -47.764,-22.24 -37.698,-22.24 U60.1 -35.763,-22.19 -25.749,-22.19 U59.1 -23.763,-22.19 -13.749,-22.19 U58.1 -11.763,-22.19 -1.749,-22.19 U57.1 0.237,-22.19 10.251,-22.19 U48.1 12.237,-22.19 22.251,-22.19 U47.1 24.237,-22.19 34.251,-22.19 U46.1 36.237,-22.19 46.251,-22.19 U45.1 48.237,-22.19 58.251,-22.19 U44.1 60.237,-22.19 70.251,-22.19 U43.1 ; U33.1 -53.749,-10.175 -43.763,-10.175 U34.1 -41.749,-10.175 -31.763,-10.175 U35.1 -29.749,-10.175 -19.763,-10.175 U36.1 -17.749,-10.175 -7.763,-10.175 U37.1 -5.749,-10.175 4.237,-10.175 U38.1 6.251,-10.175 16.237,-10.175 U39.1 18.251,-10.175 28.237,-10.175 U40.1 30.251,-10.175 40.237,-10.175 U41.1 42.251,-10.175 52.237,-10.175 U42.1 ; U32.1 -35.76,1.813 -25.752,1.813 U31.1 -23.76,1.813 -13.752,1.813 U30.1 -11.76,1.813 -1.752,1.813 U29.1 0.24,1.813 10.248,1.813 U28.1 12.24,1.813 22.248,1.813 U27.1 24.24,1.813 34.248,1.813 U26.1 ; U19.1 -35.757,25.816 -25.755,25.816 U18.1 -23.757,25.816 -13.755,25.816 U17.1 -11.757,25.816 -1.755,25.816 U16.1 0.243,25.816 10.245,25.816 U15.1 12.243,25.816 22.245,25.816 U14.1 24.243,25.816 34.245,25.816 U13.1 ; U2.1 -35.754,49.819 -25.758,49.819 U3.1 ; U20.1 -29.746,13.828 -19.766,13.828 U21.1 -17.746,13.828 -7.766,13.828 U22.1 -5.746,13.828 4.234,13.828 U23.1 6.254,13.828 16.234,13.828 U24.1 18.254,13.828 28.234,13.828 U25.1 ; U4.1 -29.743,37.831 -19.769,37.831 U5.1 -17.743,37.831 -7.769,37.831 U6.1 -5.743,37.831 4.231,37.831 U7.1 6.257,37.831 16.231,37.831 U8.1 18.257,37.831 28.231,37.831 U12.1 ; U55.1 -11.741,-46.167 -1.771,-46.167 U54.1 0.259,-46.167 10.229,-46.167 U50.1 ; U53.1 -5.755,-58.181 4.243,-58.181 U51.1 ; U56.1 -5.752,-34.178 4.24,-34.178 U49.1 ; U9.1 24.246,49.819 34.242,49.819 U11.1
NetC1_2: C1.2 R1.2 R8.1 REG1.1 S5V.1 | length 30.3
  Bottom Copper w0.381: S5V.1 35.075,-58.925 C1.2 37.919,-58.925 38.536,-58.308 38.536,-56.276 39.526,-55.286 40.301,-55.286 ; REG1.1 45.292,-47.05 44.689,-46.447 42.752,-46.447 42.024,-47.175 R1.2 40.119,-47.175 39.552,-47.742 39.552,-54.536 40.301,-55.286 ; 40.301,-55.286 42.016,-57 R8.1 42.025,-55.778 41.533,-55.286 40.301,-55.286
NetC2_2: C2.2 P1.2 Q1.1 R2.1 R3.1 R4.1 R5.1 R9.1 REG1.5 U0.8 | length 112.6
  Top Copper w0.381: R3.1 33.175,-50.154 35.666,-52.644 35.666,-58.416 36.25,-59 U0.8 41.095,-59 48.213,-51.882 53.801,-51.882 55.859,-49.825 55.859,-49.221 P1.2
  Bottom Copper w0.381: R2.1 39,-68.011 45.749,-68.011 46.74,-67.021 51.871,-67.021 R4.1@52.825,-67.975 ; REG1.5 43.032,-47.05 43.032,-47.336 42.6,-47.767 42.498,-47.767 42.32,-47.945 40.238,-47.945 40.034,-48.148 40.034,-49.774 40.912,-50.652 44.075,-50.652 C2.2 44.075,-54.651 45.474,-56.05 Q1.1@46.435,-56.05 ; R9.1 48.491,-55.975 48.416,-56.05 Q1.1 Q1.1@46.435,-56.05 ; R4.1 R4.1@52.825,-67.975 ; P1.2 57,-48.961 57.508,-49.469 58.145,-49.469 58.145,-55.68 R5.1 56.857,-55.032 53.725,-55.032 52.825,-55.932 52.825,-66.095 ; Q1.1@46.435,-56.05 46.435,-57.038 45.597,-57.877 45.597,-58.867 52.825,-66.095 ; R4.1@52.825,-67.975 52.825,-66.095
NetDIN_1: DIN.1 U1.4 | length 77.7
  Signal Layer 2 w0.381: U1.4 -20.392,39.978 -20.392,26.705 -14.195,20.508 -8.073,20.508 3,9.435 DIN.1
NetDOUT_1: DOUT.1 U63.2 | length 104.8
  Top Copper w0.381: U63.2 -70.422,-27.041 -53.438,-27.041 -52.599,-26.203 -52.599,-20.132 -48.561,-16.094 -48.561,-9.134 -47.748,-8.321 -1.596,-8.321 8,1.275 DOUT.1
NetP1_3: P1.3 U0.21 | length 5.1
  Top Copper w0.381: U0.21 55.54,-47 P1.3
NetP1_4: P1.4 U0.22 | length 5.3
  Top Copper w0.381: U0.22 55,-45 P1.4
NetP1_5: P1.5 P1.6 Q1.3 R8.2 | length 61.4
  Top Copper w0.381: P1.5 P1.6
  Bottom Copper w0.381: R8.2 39.975,-58.08 43.323,-58.08 44.403,-57 Q1.3@44.606,-57 ; Q1.3 Q1.3@44.606,-57 ; P1.5 51.496,-45.964 40.212,-45.964 33.532,-52.644 32.643,-52.644 32.643,-61.153 33.075,-61.585 40.517,-61.585 44.606,-57.496 Q1.3@44.606,-57
NetQ1_2: Q1.2 R6.1 R9.2 | length 13
  Bottom Copper w0.381: Q1.2 48.416,-57.95 48.491,-58.025 R9.2 51.058,-58.025 51.058,-50.384 50.849,-50.175 R6.1
NetR1_1: R1.1 REG1.3 | length 5.6
  Bottom Copper w0.381: R1.1 42.143,-48.825 42.616,-48.352 44.683,-48.352 45.281,-48.95 REG1.3
NetR2_2: R2.2 SW1.2 U0.1 | length 35.3
  Top Copper w0.381: v1(35,-66.405) SW1.2 32.465,-68 32.465,-45.94 33.405,-45 U0.1
  Bottom Copper w0.381: v1(35,-66.405) 35,-67.019 36.846,-68.865 37.35,-68.865 R2.2
NetR3_2: R3.2 U0.3 | length 2.7
  Top Copper w0.381: R3.2 36.148,-49 U0.3
NetR4_2: R4.2 SW2.2 U0.18 | length 28.1
  Top Copper w0.381: v1(46.816,-70.018) SW2.2@47.146,-68 ; SW2.2 SW2.2@47.146,-68 ; U0.18 47.984,-53 47.146,-53.838 SW2.2@47.146,-68
  Bottom Copper w0.381: v1(46.816,-70.018) 50.474,-70.018 51.175,-69.317 R4.2
NetR5_2: R5.2 U0.17 | length 7.7
  Top Copper w0.381: U0.17 53.725,-55 56.528,-57.803 v1(56.528,-58.061)
  Bottom Copper w0.381: R5.2 56.528,-56.353 v1(56.528,-58.061)
NetR6_2: R6.2 U0.19 | length 6.5
  Top Copper w0.381: v1(48.188,-51) U0.19
  Bottom Copper w0.381: v1(48.188,-51) 49.013,-51.825 R6.2
NetR7_1: R7.1 U0.16 | length 10.8
  Top Copper w0.381: U0.16 53.725,-57 54.589,-57.864 v1(54.589,-62.122)
  Bottom Copper w0.381: v1(54.589,-62.122) 57.383,-62.122 57.825,-61.68 R7.1
NetU1_2: U1.2 U2.4 | length 13.6
  Top Copper w0.381: U1.2 -35.232,51.77 U2.4
NetU2_2: U2.2 U3.4 | length 17.5
  Bottom Copper w0.381: U2.2 -37.664,48.202 -37.664,49.388 -37.232,49.819 -24.234,49.819 U3.4
NetU3_2: U3.2 U4.4 | length 12.3
  Top Copper w0.381: U4.4 -24.756,41.294 U3.2
NetU4_2: U4.2 U5.4 | length 17.4
  Signal Layer 1 w0.381: U4.2 -29.864,34.402 -16.582,34.402 -16.328,34.656 -16.328,35.914 U5.4
NetU5_2: U5.2 U6.4 | length 17.4
  Bottom Copper w0.381: U5.2 -17.813,34.351 -4.746,34.351 -4.339,34.757 -4.339,35.925 U6.4
NetU6_2: U6.2 U7.4 | length 17.4
  Bottom Copper w0.381: U6.2 -7.667,36.204 -7.667,37.297 -7.235,37.729 5.856,37.729 U7.4
NetU7_2: U7.2 U8.4 | length 16
  Bottom Copper w0.381: U7.2 6.39,34.148 10.393,34.148 14.126,37.881 17.704,37.881 U8.4
NetU8_2: U8.2 U9.4 | length 20.3
  Signal Layer 2 w0.381: U8.2 18.136,34.402 20.095,34.402 25.683,39.99 25.683,47.902 U9.4
NetU9_2: U9.2 U10.4 | length 31.9
  Bottom Copper w0.381: U9.2 24.579,45.959 24.693,45.959 25.683,46.949 25.683,54.264 33.888,62.469 41.117,62.469 U10.4
NetU10_2: U10.2 U11.4 | length 12.3
  Top Copper w0.381: U11.4 41.244,53.294 U10.2
NetU11_2: U11.2 U12.4 | length 12.3
  Top Copper w0.381: U12.4 35.244,41.294 U11.2
NetU12_2: U12.2 U13.4 | length 13.6
  Top Copper w0.381: U12.2 36.768,27.77 U13.4
NetU13_2: U13.2 U14.4 | length 11.1
  Signal Layer 1 w0.381: U14.4 26.292,23.294 U13.2
NetU14_2: U14.2 U15.4 | length 11.1
  Signal Layer 1 w0.381: U15.4 14.292,23.294 U14.2
NetU15_2: U15.2 U16.4 | length 11.1
  Signal Layer 1 w0.381: U16.4 2.292,23.294 U15.2
NetU16_2: U16.2 U17.4 | length 11.1
  Signal Layer 1 w0.381: U17.4 -9.708,23.294 U16.2
NetU17_2: U17.2 U18.4 | length 11.1
  Signal Layer 1 w0.381: U18.4 -21.708,23.294 U17.2
NetU18_2: U18.2 U19.4 | length 11.1
  Signal Layer 1 w0.381: U19.4 -33.708,23.294 U18.2
NetU19_2: U19.2 U20.4 | length 13.6
  Top Copper w0.381: U19.2 -29.232,15.77 U20.4
NetU20_2: U20.2 U21.4 | length 16.4
  Bottom Copper w0.381: U20.2 -29.556,10.094 -25.167,10.094 -20.875,14.386 -18.801,14.386 U21.4
NetU21_2: U21.2 U22.4 | length 17.5
  Bottom Copper w0.381: U21.2 -15.931,8.468 -12.973,8.468 -7.411,14.031 -6.445,14.031 U22.4
NetU22_2: U22.2 U23.4 | length 17.7
  Bottom Copper w0.381: U22.2 -5.76,10.297 7.395,10.297 7.802,10.703 7.802,11.784 U23.4
NetU23_2: U23.2 U24.4 | length 18
  Signal Layer 1 w0.381: U23.2 6.825,9.713 18.775,9.713 19.664,10.602 19.664,11.922 U24.4
NetU24_2: U24.2 U25.4 | length 17.5
  Bottom Copper w0.381: U24.2 18.342,10.195 31.094,10.195 31.678,10.78 31.678,11.908 U25.4
NetU25_2: U25.2 U26.4 | length 13.6
  Top Copper w0.381: U25.2 29.244,9.756 36.768,2.232 U26.4
NetU26_2: U26.2 U27.4 | length 11.1
  Signal Layer 1 w0.381: U27.4 26.292,-0.706 U26.2
NetU27_2: U27.2 U28.4 | length 11.1
  Signal Layer 1 w0.381: U28.4 14.292,-0.706 U27.2
NetU28_2: U28.2 U29.4 | length 11.1
  Signal Layer 1 w0.381: U29.4 2.292,-0.706 U28.2
NetU29_2: U29.2 U30.4 | length 11.1
  Signal Layer 1 w0.381: U30.4 -9.708,-0.706 U29.2
NetU30_2: U30.2 U31.4 | length 11.1
  Signal Layer 1 w0.381: U31.4 -21.708,-0.706 U30.2
NetU31_2: U31.2 U32.4 | length 11.1
  Signal Layer 1 w0.381: U32.4 -33.708,-0.706 U31.2
NetU32_2: U32.2 U33.4 | length 20.8
  Top Copper w0.381: U33.4 -42.756,-0.706 -37.645,-0.706 U32.2
NetU33_2: U33.2 U34.4 | length 16.2
  Bottom Copper w0.381: U33.2 -53.858,-13.604 -48.967,-13.604 -44.979,-9.617 -42.798,-9.617 U34.4
NetU34_2: U34.2 U35.4 | length 15.9
  Bottom Copper w0.381: U34.2 -41.782,-13.681 -36.369,-13.681 -32.737,-10.048 -30.366,-10.048 U35.4
NetU35_2: U35.2 U36.4 | length 16.8
  Bottom Copper w0.381: U35.2 -28.918,-14.544 -23.567,-14.544 -18.792,-9.769 U36.4
NetU36_2: U36.2 U37.4 | length 16.4
  Bottom Copper w0.381: U36.2 -17.452,-14.011 -15.623,-14.011 -11.381,-9.769 -6.646,-9.769 U37.4
NetU37_2: U37.2 U38.4 | length 16.4
  Bottom Copper w0.381: U37.2 -5.02,-14.443 -2.46,-14.443 1.782,-10.201 5.786,-10.201 U38.4
NetU38_2: U38.2 U39.4 | length 17.6
  Signal Layer 1 w0.381: U38.2 6.37,-13.833 19.181,-13.833 19.664,-13.35 19.664,-12.078 U39.4
NetU39_2: U39.2 U40.4 | length 17.6
  Bottom Copper w0.381: U39.2 18.37,-13.833 31.043,-13.833 31.678,-13.198 31.678,-12.092 U40.4
NetU40_2: U40.2 U41.4 | length 17.4
  Signal Layer 1 w0.381: U40.2 30.142,-13.604 43.26,-13.604 43.667,-13.198 43.667,-12.081 U41.4
NetU41_2: U41.2 U42.4 | length 16.1
  Bottom Copper w0.381: U41.2 42.193,-13.655 49.331,-13.655 53.217,-9.769 53.354,-9.769 U42.4
NetU42_2: U42.2 U43.4 | length 23.9
  Signal Layer 1 w0.381: U42.2 58.206,-17.668 67.254,-17.668 U43.4
NetU43_2: U43.2 U44.4 | length 11.1
  Signal Layer 1 w0.381: U44.4 62.292,-24.706 U43.2
NetU44_2: U44.2 U45.4 | length 11.1
  Signal Layer 1 w0.381: U45.4 50.292,-24.706 U44.2
NetU45_2: U45.2 U46.4 | length 11.1
  Signal Layer 1 w0.381: U46.4 38.292,-24.706 U45.2
NetU46_2: U46.2 U47.4 | length 11.1
  Signal Layer 1 w0.381: U47.4 26.292,-24.706 U46.2
NetU47_2: U47.2 U48.4 | length 11.1
  Signal Layer 1 w0.381: U48.4 14.292,-24.706 U47.2
NetU48_2: U48.2 U49.4 | length 12.3
  Top Copper w0.381: U49.4 11.244,-30.706 U48.2
NetU49_2: U49.2 U50.4 | length 13.6
  Top Copper w0.381: U49.2 12.768,-44.23 U50.4
NetU50_2: U50.2 U51.4 | length 12.3
  Top Copper w0.381: U51.4 11.244,-54.706 U50.2
NetU51_2: U51.2 U52.4 | length 12.3
  Top Copper w0.381: U52.4 0.768,-65.182 U51.2
NetU52_2: U52.2 U53.4 | length 15.4
  Signal Layer 2 w0.381: U53.4 -1.647,-62.768 -1.647,-71.816 U52.2
NetU53_2: U53.2 U54.4 | length 18.2
  Signal Layer 2 w0.381: U53.2 -7.667,-59.796 -7.667,-58.715 1.68,-49.368 1.68,-48.095 U54.4
NetU54_2: U54.2 U55.4 | length 11.1
  Signal Layer 1 w0.381: U55.4 -9.708,-48.706 U54.2
NetU55_2: U55.2 U56.4 | length 20.1
  Signal Layer 2 w0.381: U55.2 -13.661,-47.801 -13.661,-40.274 -7.667,-34.28 -6.135,-34.28 U56.4
NetU56_2: U56.2 U57.4 | length 20.4
  Signal Layer 2 w0.381: U56.2 -5.474,-37.988 -4.712,-37.988 1.68,-31.596 1.68,-24.095 U57.4
NetU57_2: U57.2 U58.4 | length 11.1
  Signal Layer 1 w0.381: U58.4 -9.708,-24.706 U57.2
NetU58_2: U58.2 U59.4 | length 11.1
  Signal Layer 1 w0.381: U59.4 -21.708,-24.706 U58.2
NetU59_2: U59.2 U60.4 | length 11.1
  Signal Layer 1 w0.381: U60.4 -33.708,-24.706 U59.2
NetU60_2: U60.2 U61.4 | length 11.1
  Signal Layer 1 w0.381: U61.4 -45.77,-24.706 U60.2
NetU61_2: U61.2 U62.4 | length 11.1
  Signal Layer 1 w0.381: U62.4 -58.218,-24.196 -49.328,-24.196 U61.2
NetU62_2: U62.2 U63.4 | length 11.1
  Signal Layer 1 w0.381: U63.4 -69.708,-24.706 U62.2
SGND: C1.1 C2.1 P1.1 R7.2 REG1.2 SGND.1 SW1.1 SW2.1 U0.15
pads on no net: REG1.4 U0.2 U0.4 U0.5 U0.6 U0.7 U0.9 U0.10 U0.11 U0.12 U0.13 U0.14 U0.20

## Polygon pours and split planes (outlines as drawn)
SGND on Top Copper "SGND_L01_P001" (solid, pour order 1): 29,-73 61,-73 62,-74 62,-33 28,-33 29,-34
GND on Top Copper "GND_L01_P000" (solid, pour order 0): -99.894,-33 -27.894,-105 26,-105 26,-35 28,-33 115,-33 116,-32 68,16 68,94 -72,94 -99.894,66.106
SGND on Bottom Copper "SGND_L04_P004" (solid, pour order 4): 62,-72 27,-72 29,-70 29,-33 61,-33 62,-34
GND on Bottom Copper "GND_L04_P003" (solid, pour order 3): 104,-33 67,4 67,90 -67,90 -99.894,57.106 -99.894,-60 -54.894,-105 10,-105 27.327,-87.673 27.327,-32.697 60.697,-32.697 62,-34 63,-33

## Silkscreen, mask and mechanical layers (free items; w line width, h text height)
Mechanical 1:
  circle w0.013: c-83.084,-27.025 r1.5
  circle w0.013: c-51.359,70.614 r1.5
  circle w0.013: c51.305,70.614 r1.5
  circle w0.013: c83.03,-27.025 r1.5
  circle w0.013: c-0.027,-87.369 r1.5
  lines w0.013: -99.888,-32.485 -23.601,-32.485 ; -99.888,-32.485 -38.17,12.356 ; -99.888,-32.485 -23.601,-32.485 ; -99.888,-32.485 -38.17,12.356 ; -61.744,84.909 -0.027,40.068 ; -61.744,84.909 -38.17,12.356 ; -61.744,84.909 -38.17,12.356 ; -61.744,84.909 -0.027,40.068 ; -23.601,-32.485 -0.027,-105.038 ; -23.601,-32.485 -0.027,-105.038 ; -0.027,-105.038 23.547,-32.485 ; -0.027,-105.038 23.547,-32.485 ; -0.027,40.068 61.69,84.909 ; -0.027,40.068 61.69,84.909 ; 23.547,-32.485 30.049,-32.485 30.049,-72 60.049,-72 60.049,-32.485 99.834,-32.485 ; 38.116,12.356 99.834,-32.485 ; 38.116,12.356 61.69,84.909 ; 38.116,12.356 99.834,-32.485 ; 38.116,12.356 61.69,84.909